# Altium PCB PCB.PcbDoc
Units mm, origin at the board's own origin, x right, y up, seen from the top; angles counter-clockwise.
Board outline 101.09 x 44.7 mm, 2 copper layers (Top Layer, Bottom Layer); 18 components, 12 nets, 47 pads, 0 vias.
Unrouted connection lines stored in the file: 1.
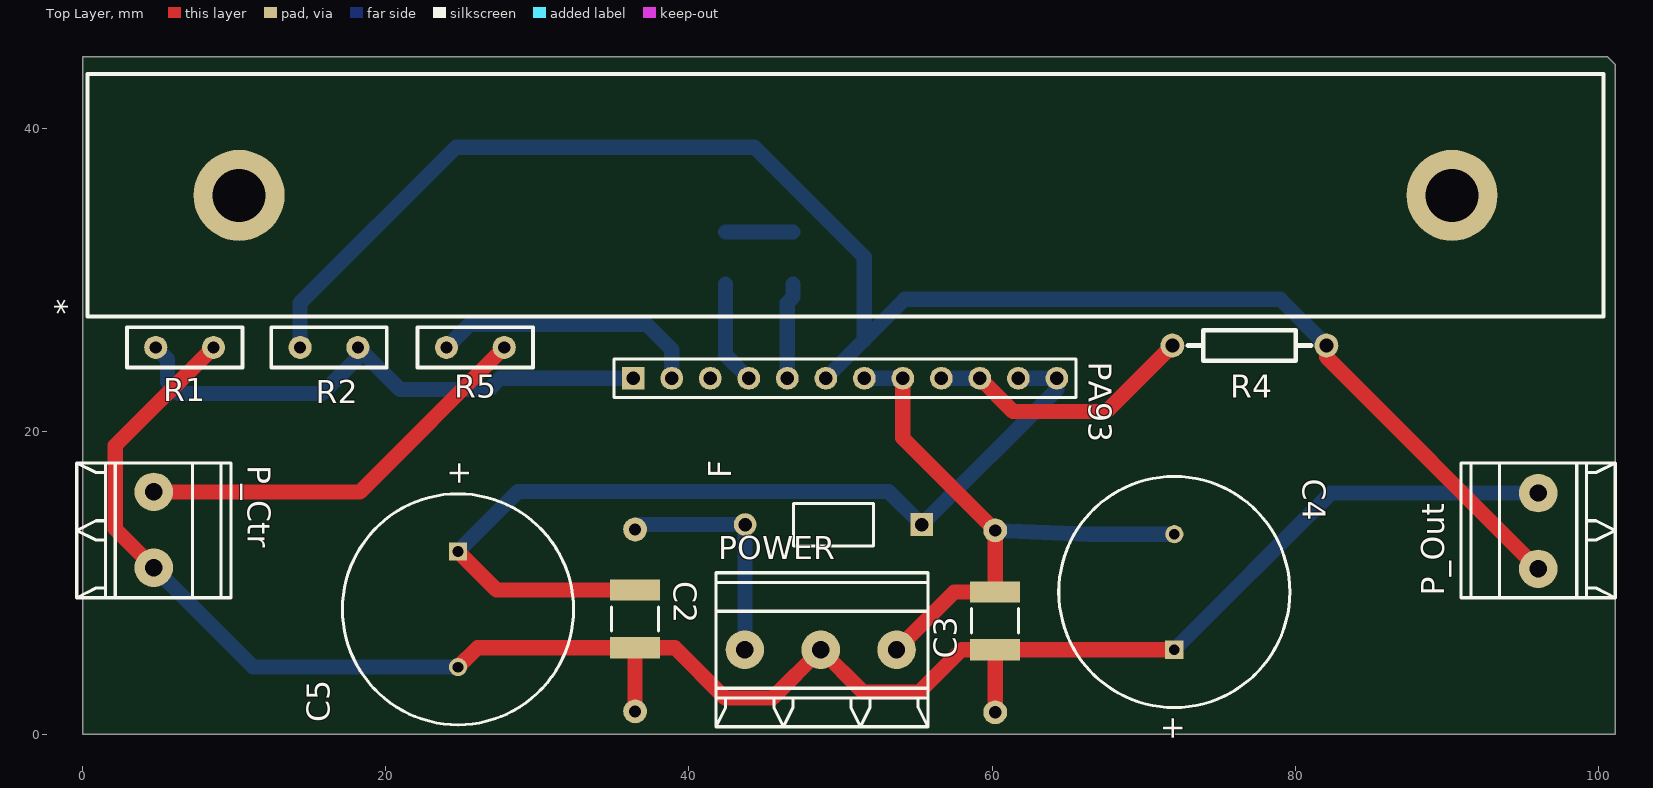
[diagram p0: Top Layer view]
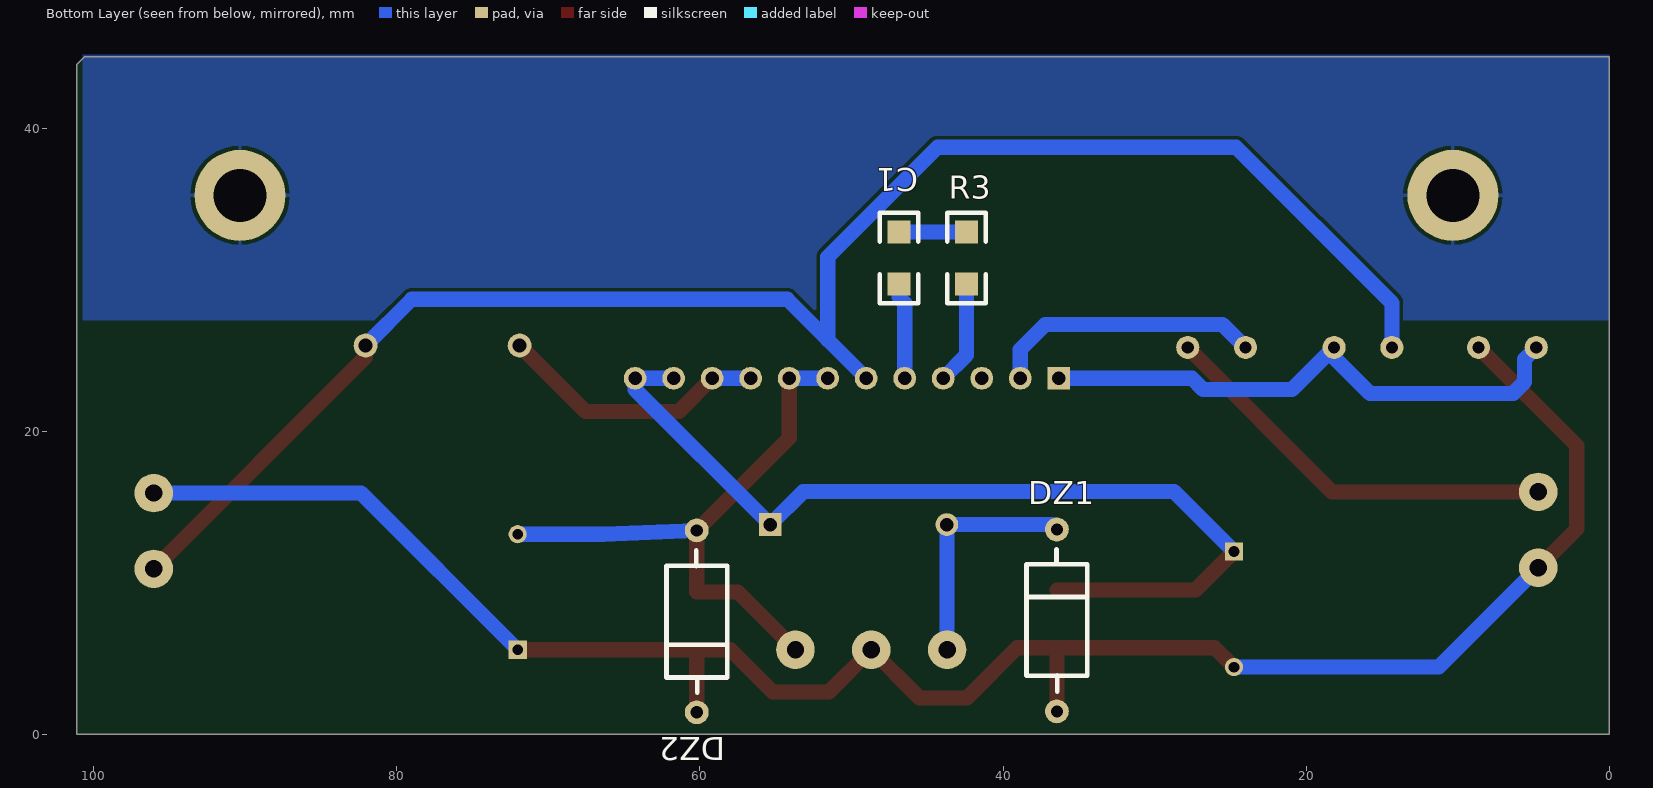
[diagram p1: Bottom Layer view, seen from below]

## Layer stack, top to bottom
Top Layer: signal copper 0.0356
Dielectric: dielectric 0.32, FR-4, Dk 4.8
Bottom Layer: signal copper 0.0356

## Board outline
0,44.704 100.584,44.704 101.092,44.196 101.092,0 0,0

## Design rules (kind name [scope] priority, off if disabled: settings)
Clearance [All] p1: gap=0.254
PolygonConnect [All] p1: connectstyle=Relief reliefconductorwidth=0.254 reliefentries=4 polygonreliefangle="90 Angle"
RoutingVias [All] p1: holewidth=0.711 width=1.27 viastyle="Through Hole" minholewidth=0.711 minwidth=1.27 maxholewidth=0.711 maxwidth=1.27
SilkscreenOverComponentPads [All] p1: minsilkscreentomaskgap=0.254
SolderMaskExpansion [All] p1: expansion=0.102
Width [All] p1: maxlimit=2 minlimit=0.5 preferedwidth=1
27 further rules are at their usual default settings.

## Components (designator, comment, footprint, x,y, rotation, side; value= is the part's Value field where it differs from the comment)
* "cooling" cooling 100.33,43.561 r180 top
C1 "Cap" 1206 46.863,33.147 r270 bottom
C2 "Cap" 1812 36.449,7.62 r270 top
C3 "Cap" 1812 60.198,7.493 r90 top
C4 "Cap Pol1" RB7.6-15 72.009,9.398 r270 top
C5 "Cap Pol1" RB7.6-15 24.765,8.255 r90 top
DZ1 "D Zener" DO-15 36.449,1.524 r90 bottom
DZ2 "D Zener" DO-15 60.198,13.462 r270 bottom
F "Fuse Thermal" PIN-W2/E2.8 49.53,13.843 r180 top
P_Ctr "Header 2" JK128-500-2p 4.699,16.002 r270 top
P_Out "Header 2" jk128-500-2p 96.012,10.922 r90 top
PA93 "PA93" HDR1X12 36.322,23.495 r0 top
POWER "Header 3" jk128-500-3p 43.688,5.588 r0 top
R1 "Res2" AXIAL-0.15 8.636,25.527 r180 top
R2 "Res2" AXIAL-0.15 18.161,25.527 r180 top
R3 "Res2" 1206 42.418,29.718 r90 bottom
R4 "Res2" axial0.4 71.882,25.654 r0 top
R5 "Res2" AXIAL-0.15 27.813,25.527 r180 top

## Footprints (in the part's own frame and the unit in brackets; to place one, negate y for a bottom-side part, rotate by r counter-clockwise, add the part's x,y. Pads: shape width x height; smd on the part's side, far side on the other; paste and mask are expansions set on the pad)
1206 [mil]
  rect 60x60 smd: 1(0,0) 2(135,0)
  silkscreen extent -50,-50 185,50
1812 [mm] "Chip Capacitor, Body 4.5x3.2mm, IPC High Density"
  rect 1.4x3.3 smd: 1(-1.9,0) 2(1.9,0)
  silkscreen extent -0.8,-1.55 0.8,1.55, body extent -2.4,-1.7 2.4,1.7, height 1.4
axial0.4 [mil]
  round 62 hole 36: 1(0,0) 2(400,0)
  silkscreen extent 40,-40 360,40
AXIAL-0.15 [mil]
  round 60 hole 31.5: 1(0,0) 2(150,0)
  silkscreen extent -75,-53 225,53
cooling [mm]
  round 6 hole 3.5: 0(10,8) 0(90,8)
  silkscreen extent 0,0 100,16
DO-15 [mil]
  round 62 hole 31.5: A(0,0) K(472.44,0)
  silkscreen extent 51,-79 421,79
HDR1X12 [mm] "Connector; Header; 12 Position"
  rect 1.5x1.5 hole 0.9: 1(0,0)
  round 1.5 hole 0.9: 2(2.54,0) 3(5.08,0) 4(7.62,0) 5(10.16,0) 6(12.7,0) 7(15.24,0) 8(17.78,0) 9(20.32,0) 10(22.86,0) 11(25.4,0) 12(27.94,0)
  silkscreen extent -1.27,-1.27 29.21,1.27
JK128-500-2p [mil]
  round 100 hole 45: 1(0,0) 2(196.85,0)
  silkscreen extent -75,-200 275,200
jk128-500-2p [mil]
  round 100 hole 45: 1(0,0) 2(196.85,0)
  silkscreen extent -75,-200 275,200
jk128-500-3p [mil]
  round 100 hole 45: 1(0,-0.02) 2(196.85,-0.02) 3(393.7,-0.02)
  silkscreen extent -75,-200 475,200
PIN-W2/E2.8 [mm] "Thru-Hole; 2 Leads"
  rect 1.5x1.5 hole 0.9: 1(-5.825,0)
  round 1.5 hole 0.9: 2(5.825,0)
  silkscreen extent -2.65,-1.4 2.65,1.4
RB7.6-15 [mm] "Polarized Capacitor (Radial); 2 Leads"
  rect 1.2x1.2 hole 0.7: 1(3.81,0)
  round 1.2 hole 0.7: 2(-3.81,0)
  silkscreen extent -7.62,-7.62 7.62,7.62

## Part data
C1 C2 C3: "Capacitor"
C4 C5: "Polarized Capacitor (Radial)"
DZ1 DZ2: "Zener Diode"
F: "Thermal Fuse"
P_Ctr P_Out: "Header, 2-Pin"
POWER: "Header, 3-Pin"
R1 R2 R3 R4 R5: "Resistor"

## Nets (pads, with @x,y where several pads share a name; then routed paths per layer and width w, separated by ;. In a path a pad name is that pad's centre, name@x,y a point inside that pad or via, vN(x,y) a via of type N, cw(c..) or ccw(c..) an arc to the next point about the centre after c; other vN are vias at no path point)
GND: *.0 C2.2 C3.1 C4.1 C5.2 DZ1.A DZ2.K P_Ctr.2 P_Out.2 POWER.2 R1.1 | length 130.4
  Top Layer w1: P_Ctr.2 2.159,13.542 2.159,19.05 R1.1 ; C5.2 26.04,5.72 C2.2 ; DZ1.A C2.2 ; DZ2.K C3.1 ; C4.1 66.096,5.588 66.091,5.593 C3.1 ; C2.2 39.065,5.72 42.372,2.413 45.513,2.413 POWER.2 51.481,2.794 55.189,2.794 57.988,5.593 C3.1
  Bottom Layer w1: P_Ctr.2 11.256,4.445 C5.2 ; C4.1 82.343,15.922 P_Out.2
INPUTWAVE: P_Ctr.1 R5.1 | length 27.1
  Top Layer w1: P_Ctr.1 18.288,16.002 R5.1
NetC1_1: C1.1 R3.2 | length 4.4
  Bottom Layer w1: R3.2 C1.1
NetC1_2: C1.2 PA93.5 | length 6.4
  Bottom Layer w1: PA93.5 46.482,28.464 46.863,28.845 C1.2
NetC2_1: C2.1 C5.1 F.1 PA93.11 PA93.12 | length 61.8
  Top Layer w1: C5.1 27.31,9.52 C2.1
  Bottom Layer w1: C5.1 28.727,16.027 53.171,16.027 F.1 64.262,22.75 PA93.12 PA93.11
NetP_Out_1: P_Out.1 PA93.6 R2.2 R4.2 | length 113.4
  Top Layer w1: R4.2 82.042,24.892 P_Out.1
  Bottom Layer w1: R2.2 14.351,28.452 24.634,38.735 44.323,38.735 51.562,31.496 51.562,26.035 PA93.6 54.229,28.702 78.994,28.702 R4.2
NetPA93_1: PA93.1 R1.2 R2.1 | length 36.7
  Bottom Layer w1: R1.2 5.604,24.749 5.604,23.241 6.35,22.495 15.794,22.495 18.161,24.862 R2.1 20.931,22.757 26.797,22.757 27.535,23.495 PA93.1
NetPA93_2: PA93.2 R5.2 | length 18.1
  Bottom Layer w1: R5.2 25.527,27.051 37.211,27.051 38.862,25.4 PA93.2
NetPA93_4: PA93.4 R3.1 | length 6.9
  Bottom Layer w1: R3.1 42.418,25.019 PA93.4
NetPA93_9: PA93.9 PA93.10 R4.1 | length 17.9
  Top Layer w1: PA93.10 61.366,21.311 67.539,21.311 R4.1
  Bottom Layer w1: PA93.9 PA93.10
V160: DZ1.K F.2 POWER.1 | length 15.7
  Bottom Layer w1: DZ1.K 36.768,13.843 F.2 43.688,13.826 POWER.1
V-30: C3.2 C4.2 DZ2.A PA93.7 PA93.8 POWER.3 | length 39.1
  Top Layer w1: POWER.3 57.494,9.393 C3.2 DZ2.A 54.102,19.558 PA93.8
  Bottom Layer w1: PA93.7 PA93.8 ; DZ2.A 66.37,13.208 C4.2
pads on no net: PA93.3

## Polygon pours and split planes (outlines as drawn)
GND on Bottom Layer "Bottom Layer-No Net" (solid, remove dead copper, pour order 6): 0,44.831 100.711,44.831 100.711,27.178 100.584,27.305 0,27.305

## Text inside footprints (layer, text, board x,y; h text height)
C4: Top Overlay "+" at 71.272,1.266 h1.5 r270
C5: Top Overlay "+" at 25.502,16.387 h1.5 r90